# Altium PCB Template_Sensor_PCB.PcbDoc
Units mil, origin at the board's own origin, x right, y up, seen from the top; angles counter-clockwise.
Board outline 2362.2 x 1377.95 mil, 2 copper layers (Top Layer, Bottom Layer); 29 components, 18 nets, 97 pads, 28 vias.
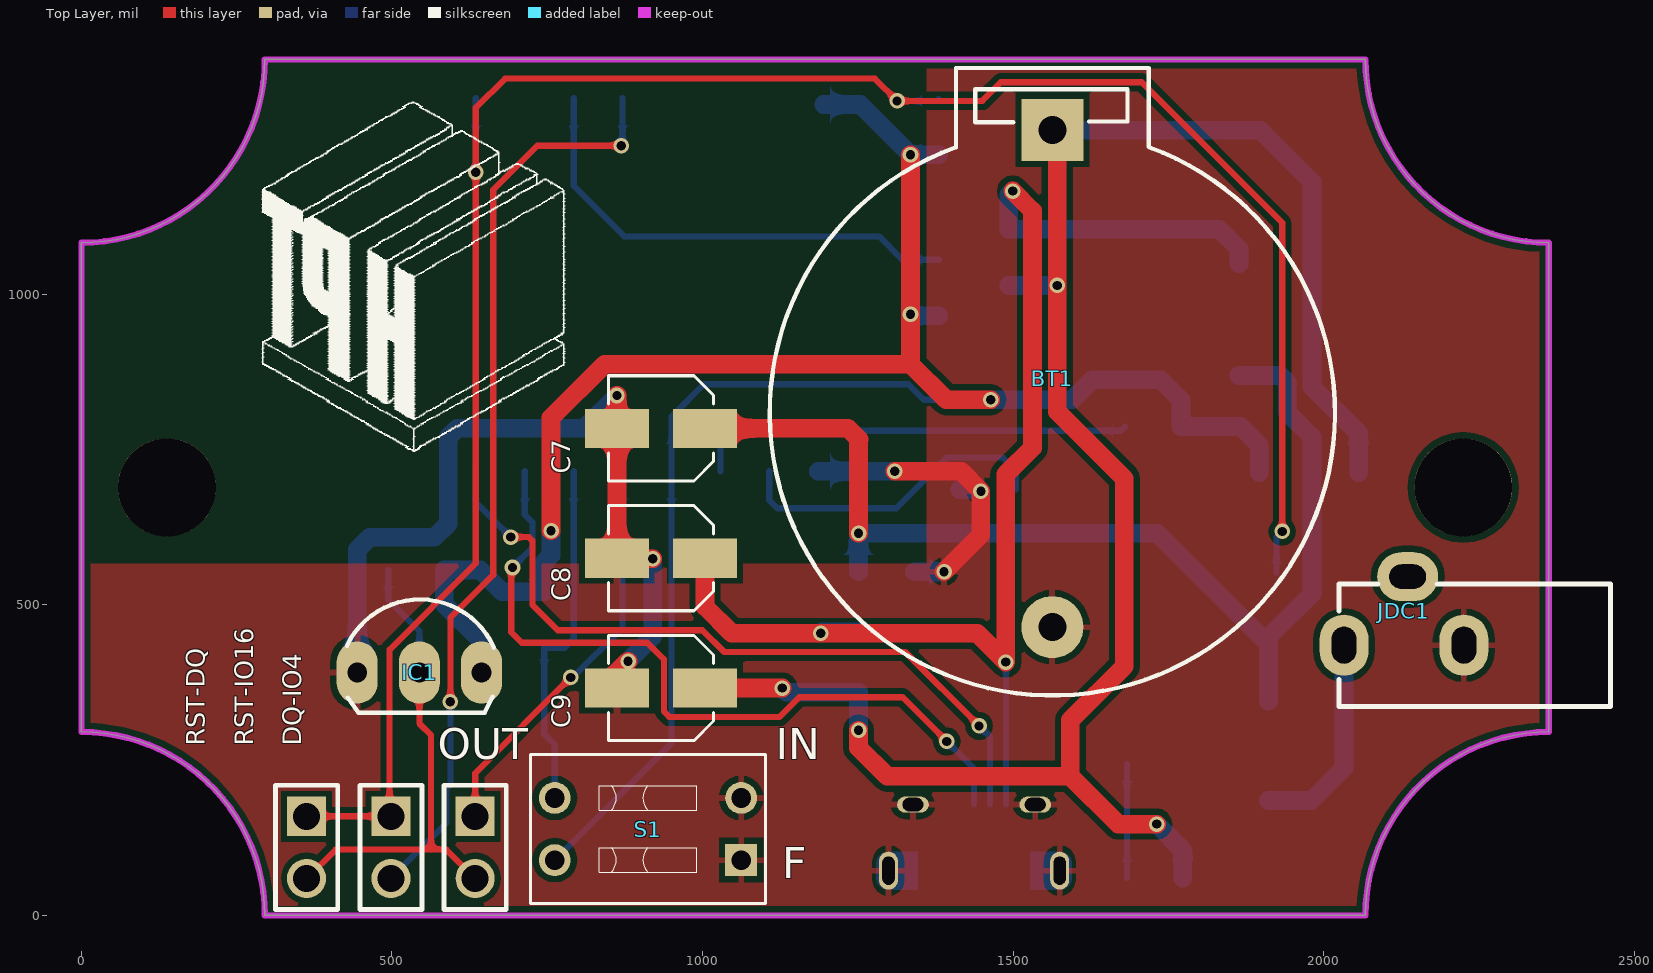
[diagram p0: Top Layer view]
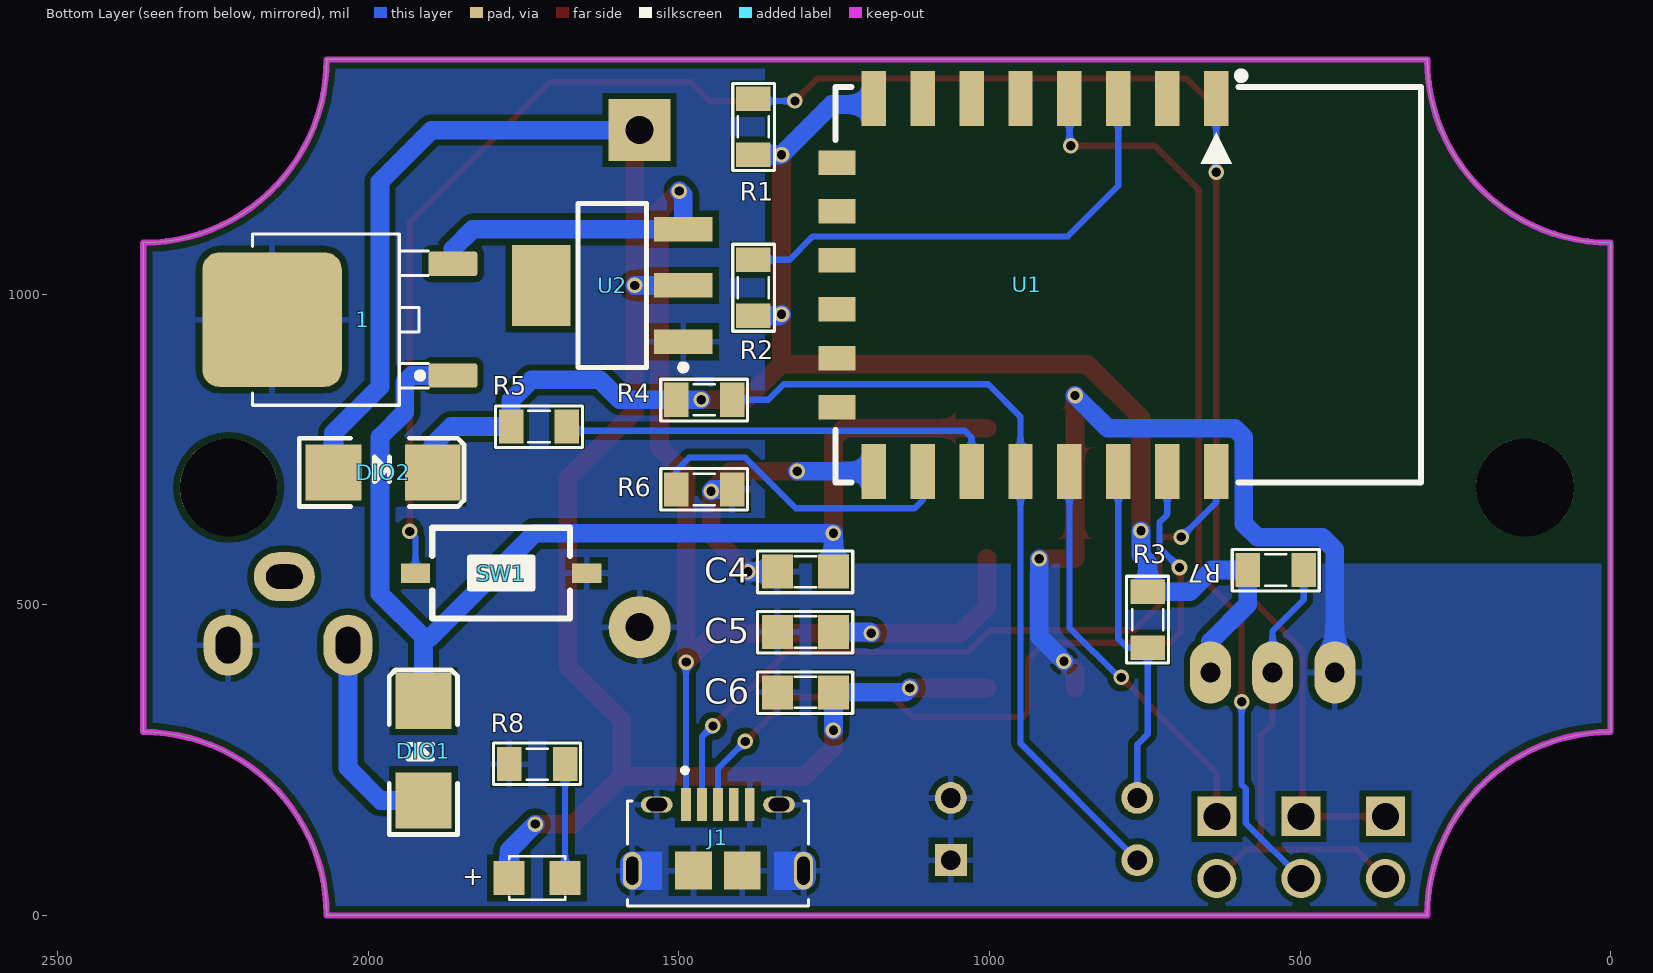
[diagram p1: Bottom Layer view, seen from below]
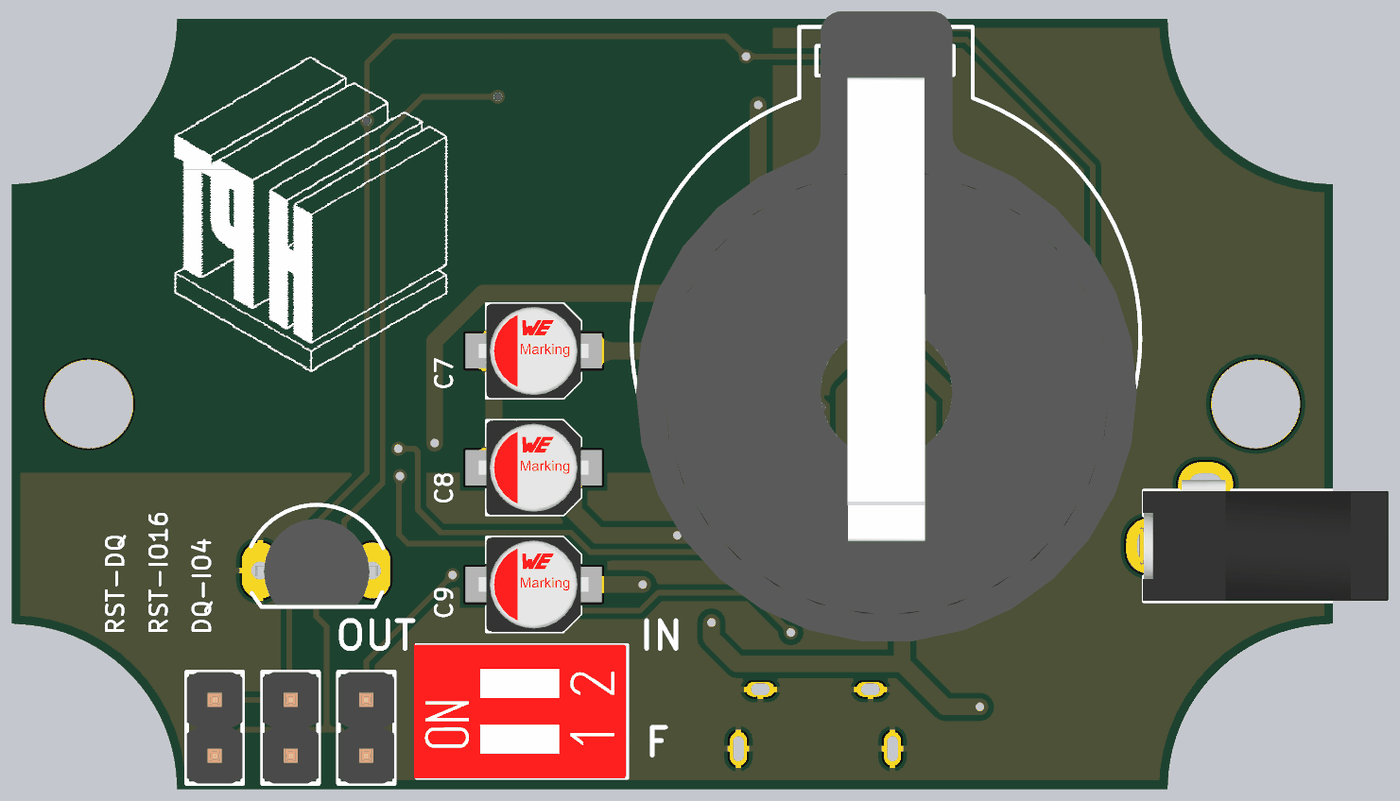
[diagram p2: 3D render of the assembled board from above, using the file's embedded part models]
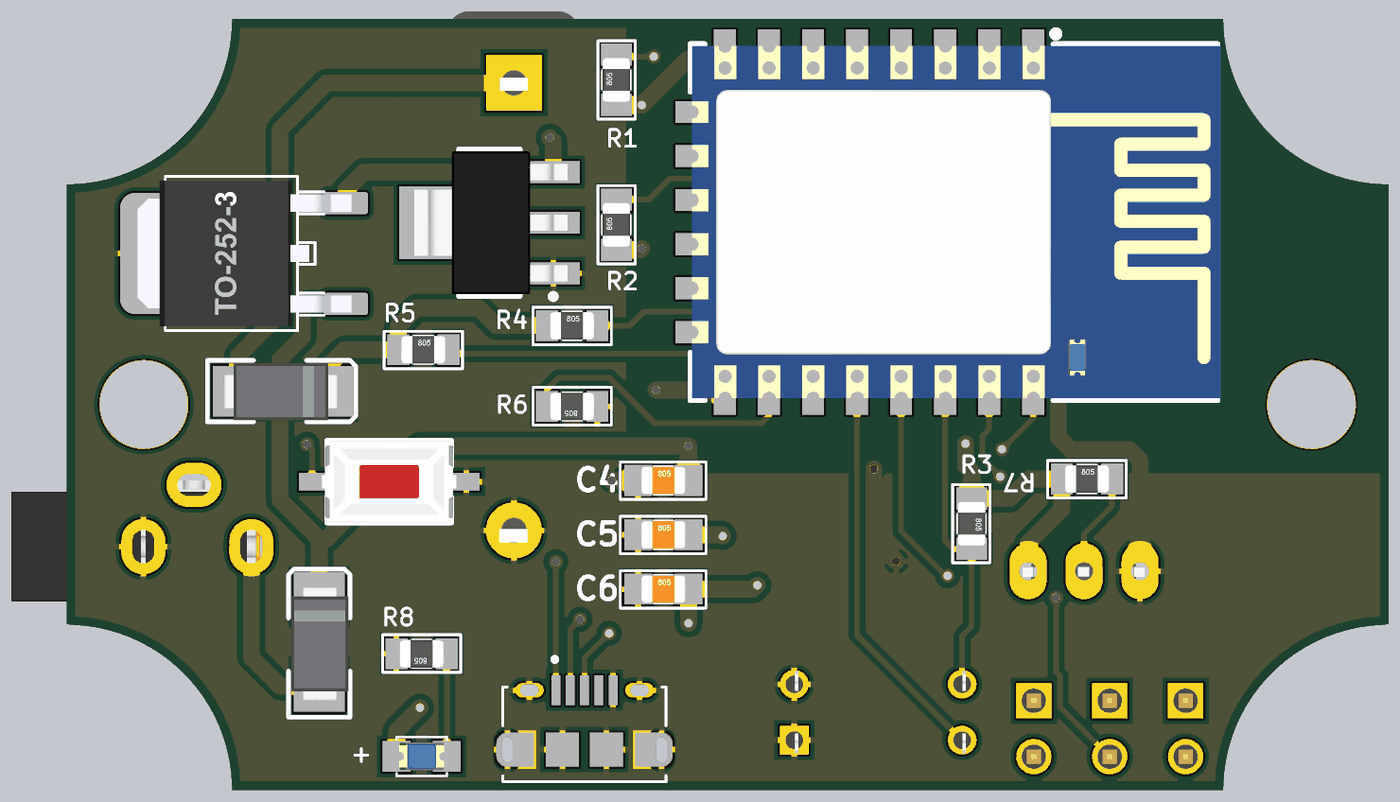
[diagram p3: 3D render of the assembled board from below, using the file's embedded part models]

## Layer stack, top to bottom
Top Solder: solder mask 0.4, Solder Resist, Dk 3.5
Top Layer: signal copper 1.4
Dielectric 1: dielectric 12.6, FR-4, Dk 4.8
Bottom Layer: signal copper 1.4
Bottom Solder: solder mask 0.4, Solder Resist, Dk 3.5

## Board outline
0,295.27 cw(c0,0) 295.27,0 2066.93,0 cw(c2362.2,0) 2362.2,295.27 2362.2,1082.68 cw(c2362.2,1377.95) 2066.93,1377.95 295.27,1377.95 cw(c0,1377.95) 0,1082.68

## Design rules (kind name [scope] priority, off if disabled: settings)
Clearance [All] p1: gap=10
PolygonConnect [All] p1: connectstyle=Relief reliefconductorwidth=10 reliefentries=4 polygonreliefangle="90 Angle" airgapwidth=10
RoomDefinition Template_Sensor_schematic [InComponentClass('Template_Sensor_schematic')] p1: confinementstyle=ConfineIn formatcopy=TRUE lockcomponents=FALSE outline 2558.07,50.33 8351.07,50.33 8351.07,1151.33 2558.07,1151.33
RoutingVias [All] p1: holewidth=15 width=25 viastyle="Through Hole" minholewidth=15 minwidth=25 maxholewidth=28 maxwidth=50
SolderMaskExpansion [All] p1: expansion=4
Width [All] p1: maxlimit=50 minlimit=8 preferedwidth=10
30 further rules are at their usual default settings.

## Classes and differential pairs
component class Template_Sensor_schematic: 1 + BT1 C7 C8 C9 DIO1 DIO2 DQ-IO4 IC1 J1 JDC1 R1 R3 R4 R5 R6 R7 R8 RST-DQ RST-IO16 S1 SW1 U1 U2

## Components (designator, comment, footprint, x,y, rotation, side; value= is the part's Value field where it differs from the comment)
1 "LM78xx" TO252-123 2009,959 r90 bottom
+ "LED" LED-0805-Blue 1773,60 r180 bottom (schematic designator LED1)
BT1 "PIN 3V" PIN3V 1563,1264 r270 top
C4 "104" SM-CAP-0805 1341,553.33 r180 bottom
C5 "104" SM-CAP-0805 1341,456.16 r180 bottom
C6 "104" SM-CAP-0805 1341,359 r180 bottom
C7 "CN-ALU-SMD" CAP-ALU-SMD-4.5x5x1.4 933,784 r180 top
C8 "CN-ALU-SMD" CAP-ALU-SMD-4.5x5x1.4 933,575 r180 top
C9 "CN-ALU-SMD" CAP-ALU-SMD-4.5x5x1.4 933,366 r180 top
DIO1 "Diode SMD" DIO-SMD-106 1911,265 r270 bottom
DIO2 "Diode SMD" DIO-SMD-106 1976,713 r0 bottom
DQ-IO4 "JP2" JP2-D1T 633.9,159.5 r270 top (schematic designator C3)
IC1 "DS18S20" DS18S20 544.07,391.04 r0 top
J1 "10118194-0001LF" AMPHENOL_10118194-0001LF 1437,72 r180 bottom
JDC1 "Jac DC" DC3 2032.52,435 r180 top
R1 "10K" RES-SMD-0805 1380.07,1269.33 r90 bottom
R2 "1K" RES-SMD-0805 1380.07,1010.33 r90 bottom
R3 "Res" RES-SMD-0805 745,476 r270 bottom
R4 "10K" RES-SMD-0805 1459.07,830 r180 bottom
R5 "10K" RES-SMD-0805 1725,787 r180 bottom
R6 "10K" RES-SMD-0805 1459.07,685.57 r0 bottom
R7 "4K7" RES-SMD-0805 539,556 r180 bottom
R8 "4K7" RES-SMD-0805 1728,243.46 r0 bottom
RST-DQ "JP2" JP2-D1T 362.63,159.5 r270 top (schematic designator C1)
RST-IO16 "JP2" JP2-D1T 498.27,159.5 r270 top (schematic designator C2)
S1 "partNo" SW-DIP2 912,139 r90 top
SW1 "SW" SW1-SMD 1786,551 r0 bottom
U1 "ESP_12_E" ESP_12_E 635,1330 r270 bottom
U2 "LM1117-3.3V" SOT223 1607,1014 r90 bottom

## Footprints (in the part's own frame and the unit in brackets; to place one, negate y for a bottom-side part, rotate by r counter-clockwise, add the part's x,y. Pads: shape width x height; smd on the part's side, far side on the other; paste and mask are expansions set on the pad)
AMPHENOL_10118194-0001LF [mm]
  rect 0.4x1.35 smd: 1(-1.3,2.7) 2(-0.65,2.7) 3(0,2.7) 4(0.65,2.7) 5(1.3,2.7)
  oval 1.3x0.65 hole 0.55 slot 0.85 at 0 deg: S1(-2.5,2.7) S2(2.5,2.7)
  oval 0.775x1.55 hole 0.5 slot 1.15 at 90 deg: S3(-3.5,0) S6(3.5,0)
  rect 1.5x1.55 smd: S4(-1,0) S5(1,0)
  Top Layer region: 193 vertices and 0 holes, not listed, extent 2.3,-0.78 4,0.775
  Top Layer region: 193 vertices and 0 holes, not listed, extent -4,-0.775 -2.3,0.78
  silkscreen extent -3.7,-1.45 3.7,4.2
CAP-ALU-SMD-4.5x5x1.4 [mm]
  rect 2.6x1.6 smd: 1(-1.8,0) 2(1.8,0)
  silkscreen extent -2.15,-2.15 2.15,2.15, body extent -2.5,-2.15 2.5,2.15, height 5.45
DC3 [mm] "WR-DC_DC Power Jack_Right Angled_THT Center Pin ?1.0_Plug ID ?1.05_Plug OD ?3.5"
  oval 2x2.5 hole 1 slot 1.5 at 90 deg: 1(0,0) 2(-4.9,0)
  oval 2.5x2 hole 1 slot 1.5 at 0 deg: 3(-2.6,-2.8)
  silkscreen extent -10.9,-2.5 0.2,2.5, body extent -10.9,-3 0.4,2.5, height 7.81
DIO-SMD-106 [mil]
  rect 90x90.55 smd: 1(80,0) 2(-80,0)
  silkscreen extent -130,-55 135,55, body extent -99,-50 106,52, height 95
DS18S20 [mil] "TO-92"
  oval 66x100 hole 32: 3(100,0) 4(0,0) 5(-100,0)
  silkscreen extent -117,-65 120,118, body extent -109,-62 111,93, height 119
ESP_12_E [mm] "ESP-12 Wi-Fi Module by AI-Thinker"
  rect 2.25x1 smd: 1(0.375,0) 2(0.375,-2) 3(0.375,-4) 4(0.375,-6) 5(0.375,-8) 6(0.375,-10) 7(0.375,-12) 8(0.375,-14) 15(15.625,-14) 16(15.625,-12) 17(15.625,-10) 18(15.625,-8) 19(15.625,-6) 20(15.625,-4) 21(15.625,-2) 22(15.625,0)
  rect 1x1.5 smd: 9(3,-15.5) 10(5,-15.5) 11(7,-15.5) 12(9,-15.5) 13(11,-15.5) 14(13,-15.5)
  silkscreen extent -0.7,-15.57 16.08,8.37, body extent 0,-15.49 16,8.51, height 2.75
JP2-D1T [mm] "2 pins, 1 row, straight, gold plating"
  rect 1.6x1.6 hole 1.1: 1(0,0)
  round 1.6 hole 1.1: 2(2.54,0)
  silkscreen extent -1.27,-1.27 3.81,1.27, body extent -1.27,-1.27 3.81,1.27, height 8.54
LED-0805-Blue [mil]
  rect 50x55 smd: 1(0,0) 2(90,0)
  silkscreen extent 0,-35 90,35, body extent 5,-25 85,25, height 43
PIN3V [mil] "Socket PIN 3V"
  rect 100x100 hole 45: 1(0,0)
  round 100 hole 45: 2(800,0)
  silkscreen extent -100,-455 910,455, body extent -128,-447 1002,449, height 278
RES-SMD-0805 [mil]
  rect 39.37x55 smd: 1(-45,0) 2(45,0)
  silkscreen extent -70,-34 70,33, body extent -39,-25 39,25, height 31
SM-CAP-0805 [mil]
  rect 50x55 smd: 1(0,0) 2(90,0)
  silkscreen extent -32,-34 121,33, body extent 6,-25 84,25, height 31
SOT223 [mm]
  rect 1x2.4 smd: 1(-2.3,-2.9) 2(0,-2.9) 3(2.3,-2.9)
  rect 3.3x2.4 smd: 4(0,2.9)
  silkscreen extent -3.47,-3.02 3.35,1.4, body extent -3.25,-3.56 3.25,3.4, height 1.68
SW1-SMD [mm]
  rect 1.2x0.8 smd: 1(-3.5,0) 2(3.5,0)
  silkscreen extent -2.82,-1.85 2.82,1.85, body extent -3.05,-1.85 3.05,1.85, height 2.5
SW-DIP2 [mm] "02p, 2.54mm Pitch, Horizontal, Box Type, THT, flat Actuator, red, without Tape, Tube"
  rect 1.3x1.3 hole 0.8: 1(-1.27,-3.81)
  round 1.3 hole 0.8: 2(1.27,-3.81) 3(1.27,3.81) 4(-1.27,3.81)
  silkscreen extent -3.04,-4.8 3.04,4.8, body extent -3.04,-4.7 3.04,4.9, height 5.4
TO252-123 [mm]
  round 0.5 on Mech15: 0(0,0)
  rrect25% 1x2 smd: 1(-2.285,-3.7) 3(2.285,-3.7)
  rrect25% 5.5x5.7 smd: 2(0,3.7)
  silkscreen extent -3.5,-2.7 3.5,4.5, body extent -3.3,-3.95 3.3,5.76, height 2.31

## Part data
1: "Positive Voltage Regulator"
+: library part "LED SMD"
BT1: "Battery 3VDC"
C4 C5 C6: library part CN
C7 C8 C9: "Polarized Capacitor (Axial)"
DIO1 DIO2: "Default Diode"
DQ-IO4 RST-DQ RST-IO16: "WR-PHD 2.54 mm Angled Socket Header"
IC1: "High Precision  1-Wire® Digital Thermometer"
J1: "USB - micro B USB 2.0 Receptacle Connector 5 Position Surface Mount, Right Angle; Through Hole"
JDC1: library part DCIN, "Jac DC input"
R1 R2 R3 R4 R5 R6 R7 R8: library part Res-SMD, "Resistor"
S1: library part SWDIP2, "WS-DITV 2.54 mm small compact THT flat actuator with top tape"
SW1: library part SW2, "Switch button 2 pin"
U1: "ESP-12 Wi-Fi Module by AI-Thinker"
U2: library part LM1117, "800mA Low-Dropout Linear Regulator"

## Free pads (board coordinates)
  round 157.48 hole 157.48: 0(137.8,688.98) 1(2224.41,688.98)

## Via types
v1: diameter 25, hole 15, Top Layer to Bottom Layer, tented both sides, 28 vias

## Nets (pads, with @x,y where several pads share a name; then routed paths per layer and width w, separated by ;. In a path a pad name is that pad's centre, name@x,y a point inside that pad or via, vN(x,y) a via of type N, cw(c..) or ccw(c..) an arc to the next point about the centre after c; other vN are vias at no path point)
3.3V: DIO2.2 IC1.3 R1.1 R2.1 R3.1 R4.1 R5.1 R7.1 U1.8 | length 2576.5
  Top Layer w30: v1(756,619) 756,801 842.33,887.33 1334.67,887.33 ; v1(1334.67,1224.33) v1(1334.67,967.67) 1334.67,887.33 ; v1(1464,830) 1392,830 1334.67,887.33
  Bottom Layer w30: IC1.3 644.07,440.93 584,501 R7.1 642,556 677,521 R3.1 745,568.57 756,579.57 v1(756,619) ; U1.8@1195.18,1305.24 1253.76,1305.24 v1(1334.67,1224.33) R1.1 ; v1(1334.67,967.67) 1337.02,965.33 R2.1 ; v1(1464,830) R4.1 1595,830 1627,862 1737,862 1770,829 R5.1 1866,787 1896,757 DIO2.2
5V: 1.3 C5.2 C8.1 J1.1 U2.3 | length 2151.1
  Top Layer w30: C8.1 1003.87,497.13 1047,454 v1(1190,454) 1442,454 v1@1488,408 ; v1(1488.18,407.82) v1@1488,408 ; v1(1499,1166) 1531,1134 1531,753 1488,710 v1@1488,408
  Bottom Layer w10: J1.1 v1(1488.18,407.82)
  Bottom Layer w30: v1(1190,454) 1192.16,456.16 C5.2 ; v1(1499,1166) 1492.83,1159.83 U2.3 1831.45,1104.55 1863.33,1072.67 1.3
12V: DIO1.1 JDC1.1 | length 340.8
  Bottom Layer w30: DIO1.1 1980,185 2032.52,237.52 JDC1.1
DQ: DQ-IO4.2 IC1.4 R7.2 RST-DQ.2 | length 788.4
  Top Layer w10: RST-DQ.2 409.13,106 563,106 ; IC1.4 544.07,308.93 563,290 563,106 ; DQ-IO4.2 587.41,106 563,106
  Bottom Layer w10: R7.2 494,508 544.07,457.93 IC1.4
FLASH: R4.2 S1.4 U1.18 | length 1287.8
  Bottom Layer w10: S1.4 949.96,276.96 U1.18 949.96,802.96 1002,855 1331,855 1356,830 R4.2
GND: 1.2 BT1.2 C4.1 C5.1 C6.1 C7.2 C8.2 C9.2 IC1.5 J1.5 J1.S1 J1.S2 J1.S3 J1.S4 J1.S5 J1.S6 JDC1.2 R6.1 R8.2 S1.1 S1.2 SW1.1 U1.15 U2.1 | length 1864
  Top Layer w30: C9.2 862.13,391.13 v1(880,409) ; v1(862.13,836.87) C7.2 C8.2 863.13,574 v1(919.96,574) ; v1(1309.16,714.84) 1416.16,714.84 v1(1448,683) 1448,612.66 v1(1388.67,553.33)
  Bottom Layer w30: IC1.5 444,391.11 444,588.54 463.96,608.5 568.5,608.5 590.31,630.31 590.31,769.49 604.96,784.13 809.4,784.13 v1(862.13,836.87) ; v1(880,409) 919.96,448.96 v1(919.96,574) ; U1.15 v1(1309.16,714.84) ; C4.1 v1(1388.67,553.33) ; R6.1 1445.43,685.57 v1(1448,683)
GPIO4: DQ-IO4.1 U1.19 | length 655.4
  Top Layer w10: DQ-IO4.1 633.9,228.9 v1(788,383)
  Bottom Layer w10: v1(788,383) 791,383 871.22,463.22 U1.19
GPIO16: RST-IO16.2 U1.4 | length 1489.3
  Top Layer w10: v1(594,344) 594,479 663,548 663,1168 734,1239 v1(869,1239)
  Bottom Layer w10: RST-IO16.2 587.41,148.64 587.41,203.8 594,210.4 v1(594,344) ; v1(869,1239) 871.22,1241.22 U1.4
MODE: R3.2 S1.3 U1.20 | length 571.9
  Bottom Layer w10: S1.3 762,275 745,292 R3.2 778,431 792.48,445.48 U1.20
Net1_1: 1.1 C4.2 C7.1 DIO1.2 | length 1838.7
  Top Layer w30: C7.1 1234,784 1252,766 1251,765 v1(1251,615)
  Bottom Layer w30: C4.2 v1(1251,615) 1732,615 1899,448 1911,448 ; 1.1 1929.96,869.04 1941,858 1941,810 1981,770 1981,518 1911,448 ; DIO1.2 1911,448
NetBT1_1: +.1 BT1.1 C6.2 C9.1 DIO2.1 U2.2 | length 3128.1
  Top Layer w30: C9.1 v1(1128,366) ; v1(1251,298) 1251,270 1297,224 1592,224 ; BT1.1 1571,1256 v1(1571,1014) 1571,811 1679,703 1679,401 1592,314 1592,224 ; v1(1731,147) 1669,147 1592,224
  Bottom Layer w30: v1(1128,366) 1135,359 C6.2 v1(1251,298) ; U2.2 v1(1571,1014) ; BT1.1 1898,1264 1981,1181 1981,851 2056,776 DIO2.1 ; v1(1731,147) 1773,105 +.1
NetLED1_2: +.2 R8.1 | length 183.5
  Bottom Layer w10: +.2 R8.1
NetR2_2: R2.2 U1.3 | length 777.7
  Bottom Layer w10: U1.3 792.48,1174.52 874,1093 1284,1093 1321.67,1055.33 R2.2
NetR5_2: R5.2 U1.17 | length 712.7
  Bottom Layer w10: U1.17 1028.7,768.7 1040,780 1673,780 R5.2
NetR6_2: R6.2 U1.16 | length 521.1
  Bottom Layer w10: U1.16 1107.44,668.56 1120.45,655.55 1311.55,655.55 1393,737 1483,737 1504.07,715.93 R6.2
RST: R1.2 RST-DQ.1 RST-IO16.1 SW1.2 U1.1 | length 3527.6
  Top Layer w10: RST-DQ.1 RST-IO16.1@496.07,159.5 ; RST-IO16.1 RST-IO16.1@496.07,159.5 ; v1(1933,618) 1933,1115 1707,1341 1480,1341 1450,1311 v1(1313,1311) 1277,1347 682,1347 635,1300 v1(635,1196) 635,566.85 496.07,427.92 RST-IO16.1@496.07,159.5
  Bottom Layer w10: v1(635,1196) U1.1 ; v1(1313,1311) 1376.75,1311 R1.2 ; SW1.2 1923.8,608.8 v1(1933,618)
RX: J1.2 U1.22 | length 1203.3
  Top Layer w10: v1(691,609) 720,609 726,603 726,500 767,459 999.57,459 1034.57,424 1326,424 v1(1445,305)
  Bottom Layer w10: U1.22 635,665 v1(691,609) ; v1(1445,305) 1462.59,287.41 J1.2
TX: J1.3 U1.21 | length 1248.5
  Top Layer w10: v1(694,560) 692,560 692,455.72 708.72,439 911,439 937.68,412.31 937.68,328.29 946.47,319.5 1123.93,319.5 1155.43,351 1322,351 v1(1393,280)
  Bottom Layer w10: v1(694,560) 726,592 726,633 713.74,645.26 U1.21 ; v1(1393,280) 1437,236 J1.3
pads on no net: 1.0 J1.4 JDC1.3 U1.2 U1.5 U1.6 U1.7 U1.9 U1.10 U1.11 U1.12 U1.13 U1.14 U2.4

## Polygon pours and split planes (outlines as drawn)
GND on Top Layer "Bottom Layer-No Net" (solid, remove dead copper, pour order 2): 0,295.27 0,566 1361,566 1361,1377.95 2066.93,1377.95 2362.2,1377.95 2362.2,298 2362.2,0 295.27,0
GND on Bottom Layer "Bottom Layer-No Net" (solid, remove dead copper, pour order 4): 0,566 1362,566 1362,1377.95 2066.93,1377.95 2362.2,1377.95 2362.2,295.27 2362.2,0 295.27,0 0,0 0,295.27

## Keep-outs
Keep-Out Layer:
  the board outline again, w10

## Silkscreen, mask and mechanical layers (free items; w line width, h text height)
Top Overlay:
  drawing of 2330 lines, arcs and shapes, not listed
  text "OUT" at 574,251 h50
  text "IN" at 1118,251 h50
  text "F" at 1128,60 h50

## Text inside footprints (layer, text, board x,y; h text height)
U1: Mechanical 13 "CUTOUT POLYGON" at 345,1325 h10 r90; Mechanical 13 "ANTENNA AREA" at 325,1325 h10 r90